# Altium PCB Signal_Generator.PcbDoc
Units mm, origin at the board's own origin, x right, y up, seen from the top; angles counter-clockwise.
Board outline 99.2 x 99.2 mm, 2 copper layers (Top Layer, Bottom Layer), stack 1.671 mm thick; 46 components, 32 nets, 125 pads, 14 vias.
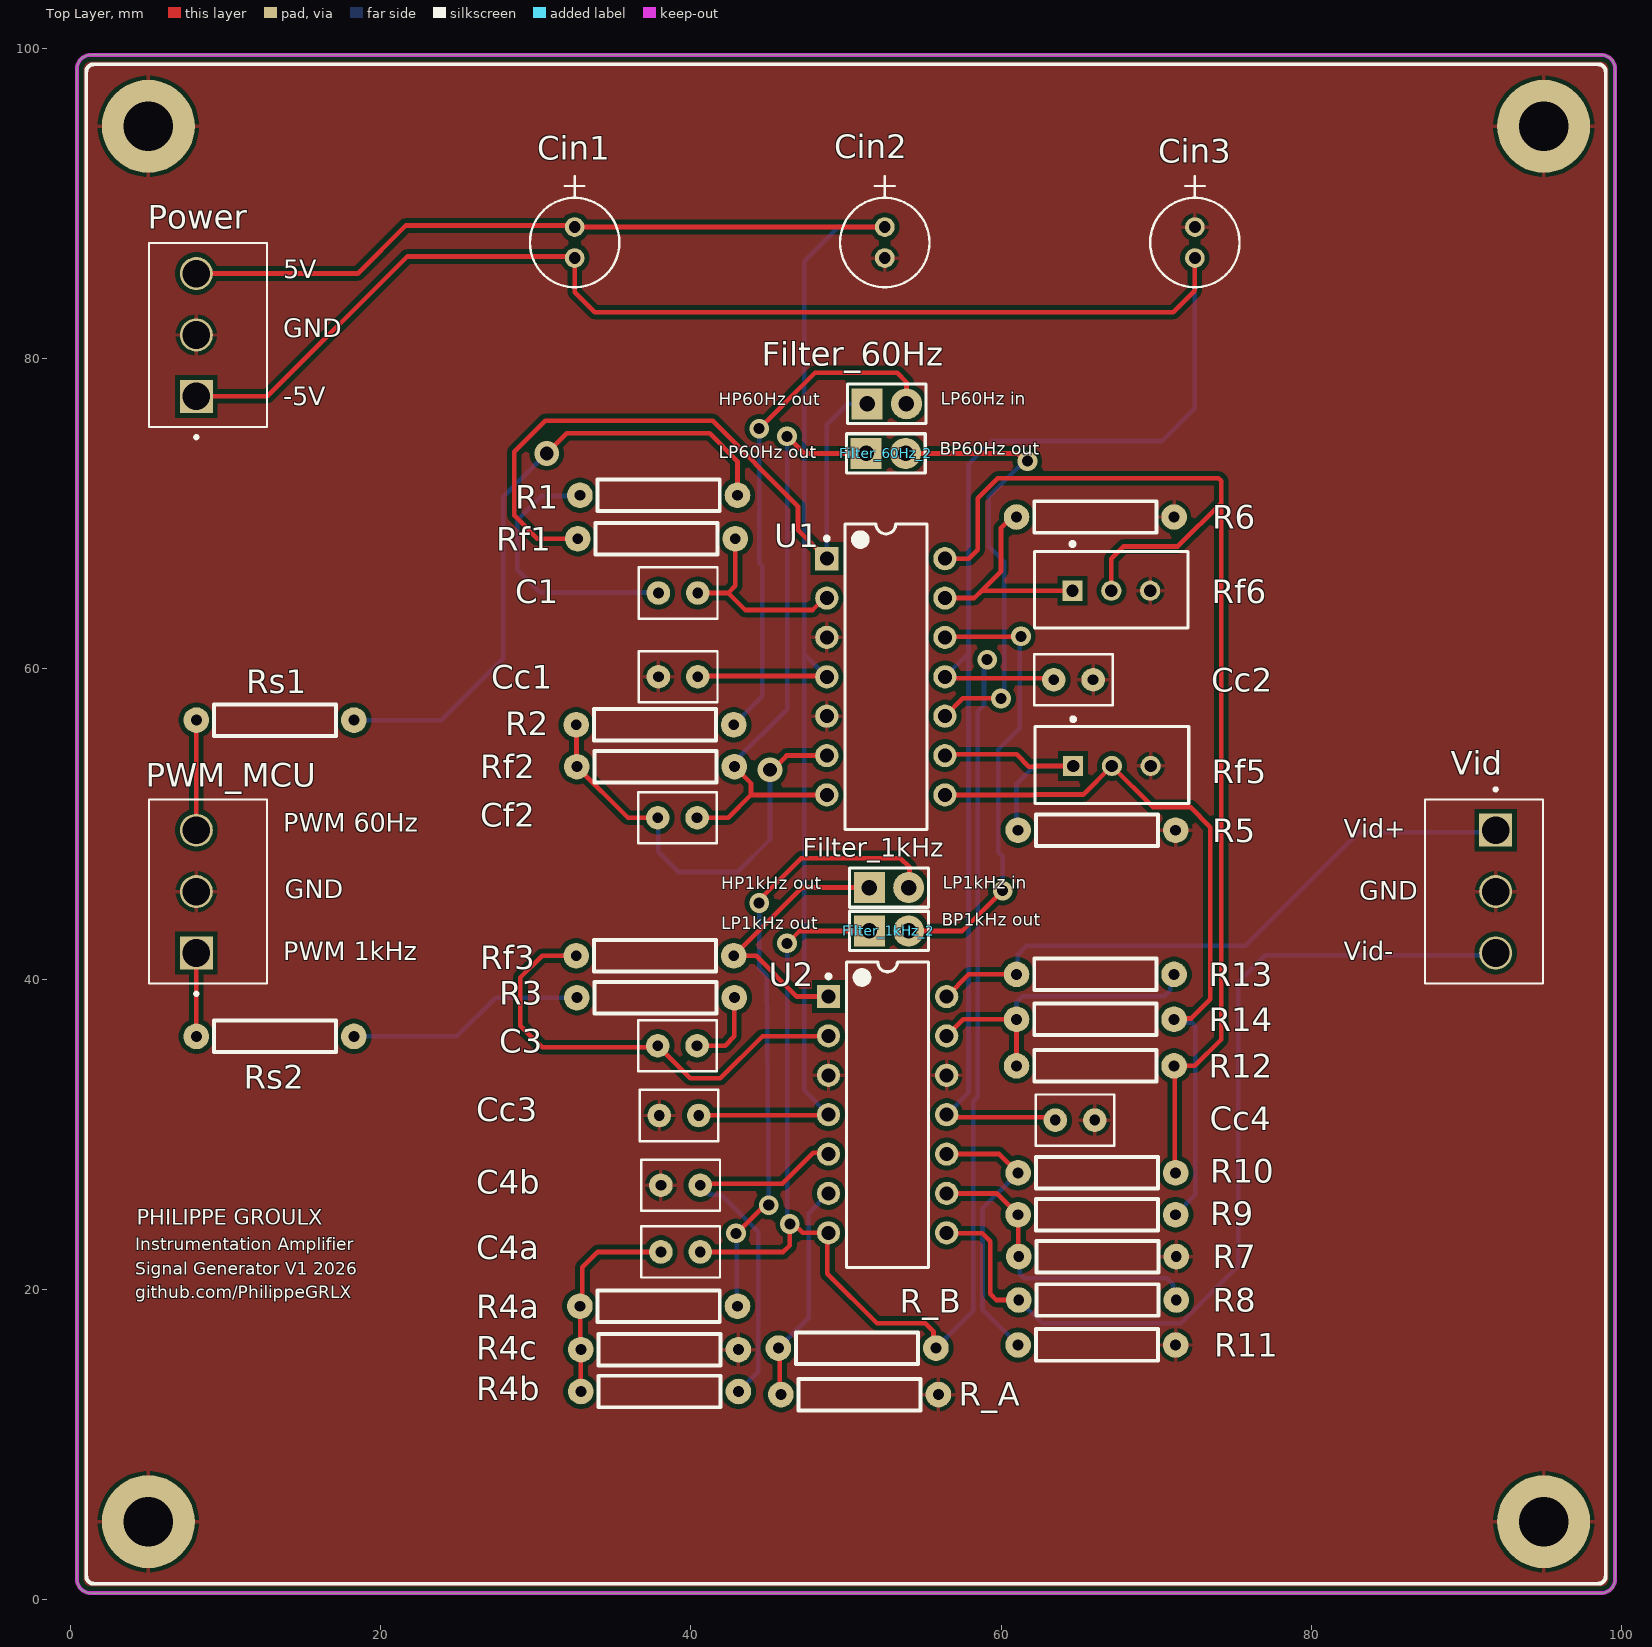
[diagram p0: Top Layer view]
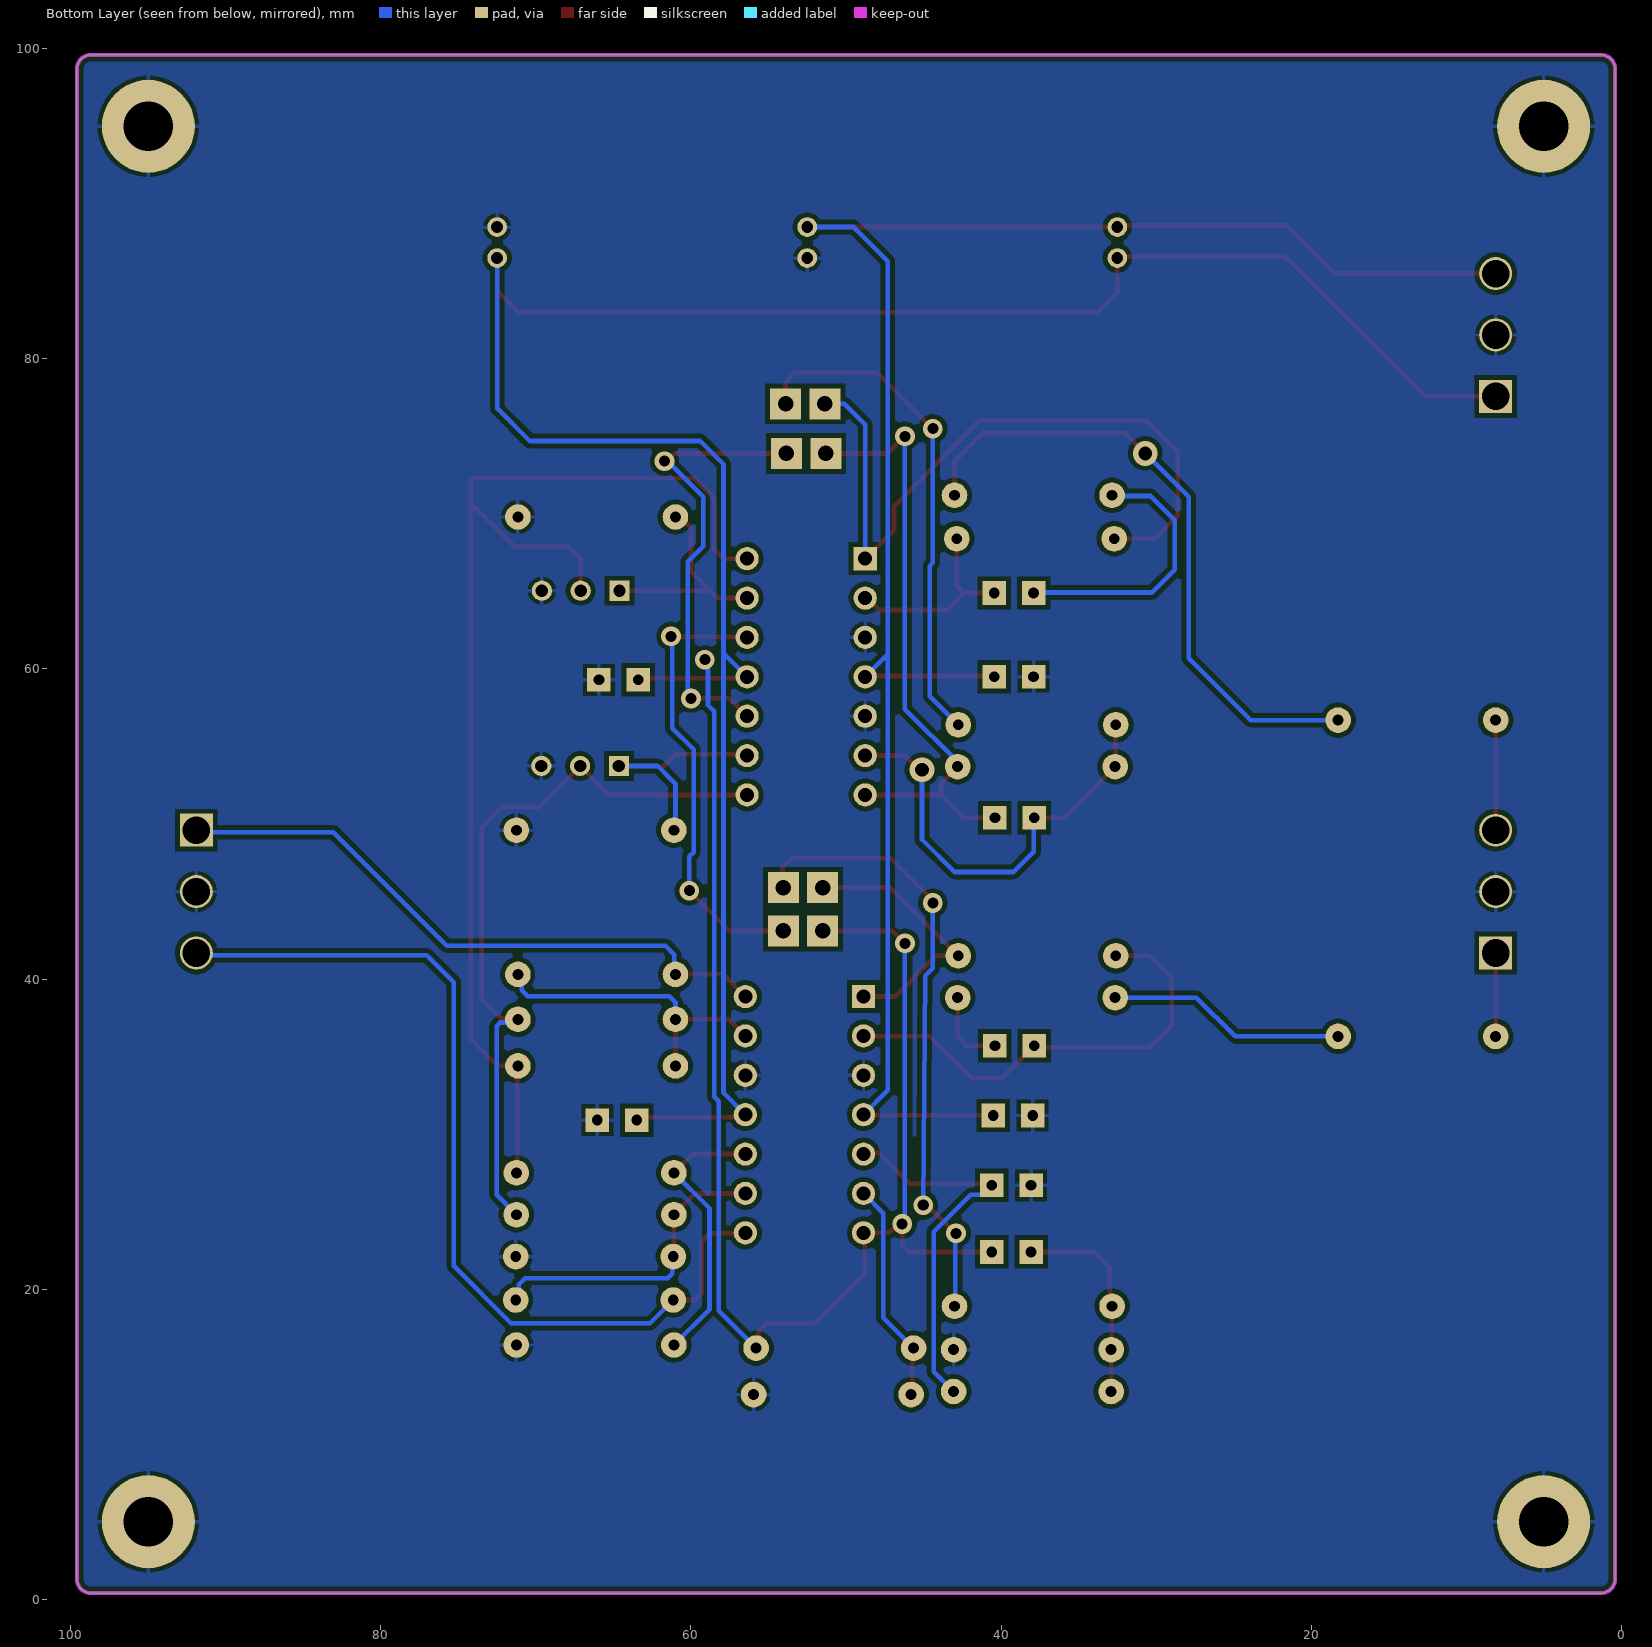
[diagram p1: Bottom Layer view, seen from below]
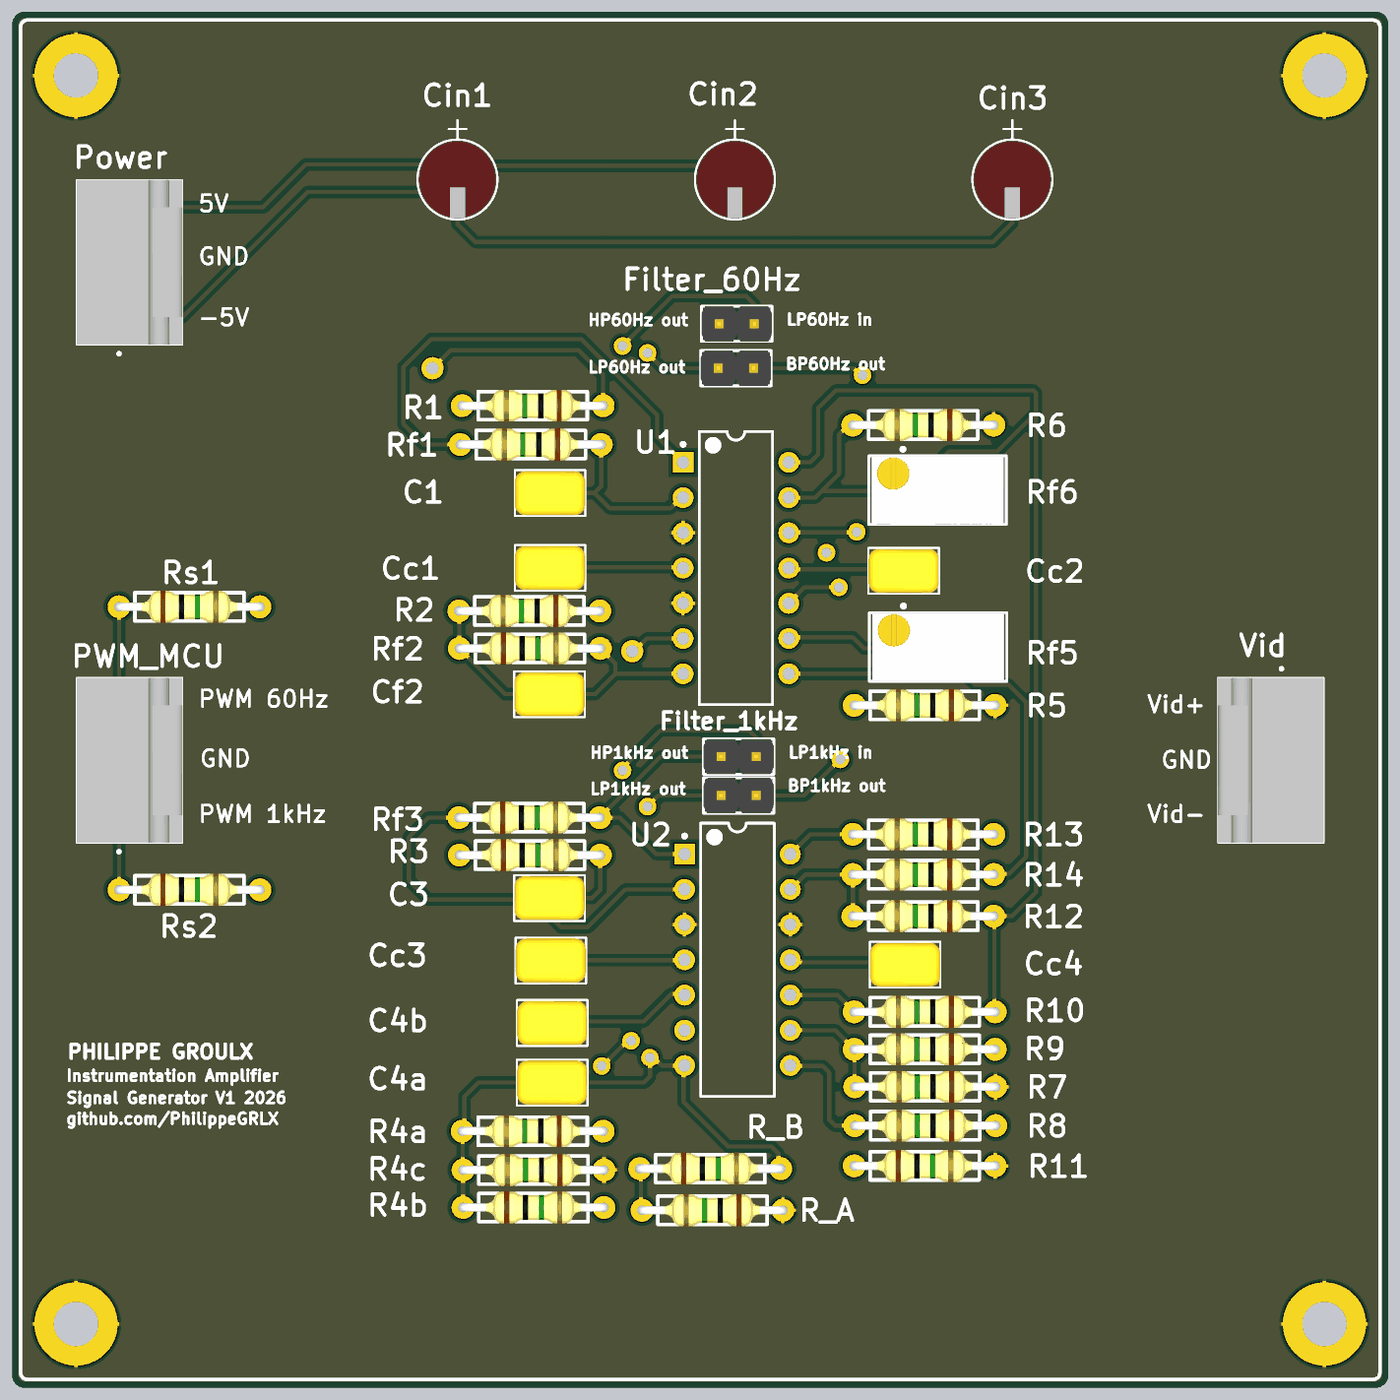
[diagram p2: 3D render of the assembled board from above, using the file's embedded part models]

## Layer stack, top to bottom
Top Solder: solder mask 0.0102, Solder Resist, Dk 3.5
Top Layer: signal copper 0.0356
Dielectric 1: dielectric 1.6, FR-4, Dk 4.8
Bottom Layer: signal copper 0.0356
Bottom Solder: solder mask 0.0102, Solder Resist, Dk 3.5

## Board outline
0.4,98.7 cw(c1.3,98.7) 1.3,99.6 98.7,99.6 cw(c98.7,98.7) 99.6,98.7 99.6,1.3 cw(c98.7,1.3) 98.7,0.4 1.3,0.4 cw(c1.3,1.3) 0.4,1.3

## Design rules (kind name [scope] priority, off if disabled: settings)
Clearance Clearance_2 [InNamedPolygon('GND_L02_P002')] p1: gap=0.3 ignorepadtopadclearanceinfootprint=FALSE
Clearance Clearance_1 [InNamedPolygon('GND_L01_P000')] p2: gap=0.3 ignorepadtopadclearanceinfootprint=FALSE
Clearance [All] p3: gap=0.3 ignorepadtopadclearanceinfootprint=FALSE
HoleSize [All] p1: absolutevalues=TRUE maxlimit=3.2 minlimit=0.025 maxpercent=80.000 minpercent=20.000
PolygonConnect [All] p1: connectstyle=Relief reliefconductorwidth=0.254 reliefentries=4 polygonreliefangle="90 Angle" airgapwidth=0.254
RoutingVias [All] p1: holewidth=0.3 width=0.3 viastyle="Through Hole" minholewidth=0.3 minwidth=0.3 maxholewidth=1 maxwidth=2
SilkToSolderMaskClearance [IsPad] p1: minsilkscreentomaskgap=0.18 clearancetoexposedcopper=TRUE
SolderMaskExpansion [All] p1: expansion=0.102 istentingtop=FALSE
SupplyNets "Schematic Supply Nets_2" [InNet('VDD')] p1: voltage=0.000
SupplyNets "Schematic Supply Nets_1" [InNet('VSS')] p2: voltage=0.000
SupplyNets "Schematic Supply Nets" [InNet('GND')] p3: voltage=0.000
Width [All] p1: maxlimit=0.3 minlimit=0.3 preferedwidth=0.3
28 further rules are at their usual default settings.

## Classes and differential pairs
component class Generator_main: Cin1 Cin2 Cin3 Power PWM_MCU Rs1 Rs2 Vid
component class Filtre_PWM60Hz: C1 Cc1 Cc2 Cf2 Filter_60Hz Filter_60Hz_2 R1 R2 R5 Rf1 Rf2 Rf5 U1
component class Filtre_PWM1kHz: C3 C4a C4b Cc3 Cc4 Filter_1kHz Filter_1kHz_2 R3 R4a R4b R4c R6 R_A R_B Rf3 Rf6 U2
component class Differential_Noise_Generator: R7 R8 R9 R10 R11 R12 R13 R14

## Components (designator, comment, footprint, x,y, rotation, side; value= is the part's Value field where it differs from the comment)
C1 "Cap" "condensateur 0.1uf 100mil" 37.9,64.9 r0 top value=100nF
C3 "Cap" "condensateur 0.1uf 100mil" 40.4,35.7 r180 top value=100nF
C4a "Cap" "condensateur 0.1uf 100mil" 40.6,22.4 r180 top value=100nF
C4b "Cap" "condensateur 0.1uf 100mil" 38.06,26.7 r0 top value=100nF
Cc1 "Cap" "condensateur 0.1uf 100mil" 40.44,59.5 r180 top value=100nF
Cc2 "Cap" "condensateur 0.1uf 100mil" 63.4,59.3 r0 top value=100nF
Cc3 "Cap" "condensateur 0.1uf 100mil" 40.5,31.2 r180 top value=100nF
Cc4 "Cap" "condensateur 0.1uf 100mil" 63.5,30.9 r0 top value=100nF
Cf2 "Cap" "condensateur 0.1uf 100mil" 37.86,50.4 r0 top value=100nF
Cin1 "Cap Pol1" RB7.6-15 32.5,88.5 r270 top value=10uF
Cin2 "Cap Pol1" RB7.6-15 52.5,88.5 r270 top value=10uF
Cin3 "Cap Pol1" RB7.6-15 72.5,88.5 r270 top value=10uF
Filter_1kHz "Jumper" "Header 2P 100mil" 51.5,45.9 r0 top
Filter_1kHz_2 "Jumper" "Header 2P 100mil" 51.5,43.1 r0 top
Filter_60Hz "Jumper" "Header 2P 100mil" 51.36,77.1 r0 top
Filter_60Hz_2 "Jumper" "Header 2P 100mil" 51.3,73.9 r0 top
Power "Header 3" MTA_3M 8.1,77.58 r90 top
PWM_MCU "Header 3" MTA_3M 8.1,41.68 r90 top
R1 "Res1" "Resistor_Axial 0.4" 43,71.2 r180 top value=8.2K
R2 "Res1" "Resistor_Axial 0.4" 42.76,56.4 r180 top value=8.2K
R3 "Res1" "Resistor_Axial 0.4" 32.64,38.8 r0 top value=8.2K
R4a "Res1" "Resistor_Axial 0.4" 43,18.9 r180 top value=8.2K
R4b "Res1" "Resistor_Axial 0.4" 32.9,13.4 r0 top value=8.2K
R4c "Res1" "Resistor_Axial 0.4" 43.06,16.1 r180 top value=8.2K
R5 "Res1" "Resistor_Axial 0.4" 71.26,49.6 r180 top value=8.2K
R6 "Res1" "Resistor_Axial 0.4" 71.16,69.8 r180 top value=8.2K
R7 "Res1" "Resistor_Axial 0.4" 71.3,22.1 r180 top value=8.2K
R8 "Res1" "Resistor_Axial 0.4" 71.3,19.3 r180 top value=8.2K
R9 "Res1" "Resistor_Axial 0.4" 71.26,24.8 r180 top value=8.2K
R10 "Res1" "Resistor_Axial 0.4" 71.26,27.5 r180 top value=8.2K
R11 "Res1" "Resistor_Axial 0.4" 61.1,16.4 r0 top value=8.2K
R12 "Res1" "Resistor_Axial 0.4" 71.16,34.4 r180 top value=8.2K
R13 "Res1" "Resistor_Axial 0.4" 71.16,40.3 r180 top value=8.2K
R14 "Res1" "Resistor_Axial 0.4" 71.16,37.4 r180 top value=8.2K
R_A "Res1" "Resistor_Axial 0.4" 55.96,13.2 r180 top value=8.2K
R_B "Res1" "Resistor_Axial 0.4" 45.64,16.2 r0 top value=8.2K
Rf1 "Res1" "Resistor_Axial 0.4" 42.86,68.4 r180 top value=8.2K
Rf2 "Res1" "Resistor_Axial 0.4" 32.64,53.7 r0 top value=8.2K
Rf3 "Res1" "Resistor_Axial 0.4" 32.6,41.5 r0 top value=8.2K
Rf5 "67WR100KLF" FP-67W-MFG 67.151,53.808 r180 top
Rf6 "67WR100KLF" FP-67W-MFG 67.111,65.109 r180 top
Rs1 "Res1" "Resistor_Axial 0.4" 8.1,56.7 r0 top value=8.2K
Rs2 "Res1" "Resistor_Axial 0.4" 8.1,36.3 r0 top value=8.2K
U1 "TL084ACN" N0014A 52.573,59.494 r0 top
U2 "TL084ACN" N0014A 52.681,31.252 r0 top
Vid "Header 3" MTA_3M 91.9,49.6 r270 top

## Footprints (in the part's own frame and the unit in brackets; to place one, negate y for a bottom-side part, rotate by r counter-clockwise, add the part's x,y. Pads: shape width x height; smd on the part's side, far side on the other; paste and mask are expansions set on the pad)
"condensateur 0.1uf 100mil" [mil] "condensateur 0.1uf 100mil, Thru hole"
  round 60 / inner round 60 / far side rect 60x60 hole 27.56: 1(0,0) 2(100,0)
  silkscreen extent -50,-65 150,65, body extent -50,-63 150,62, height 309
FP-67W-MFG [mm]
  rect 1.3x1.3 hole 0.8 paste-2539.97 mask+0: 1(2.5,0.065)
  round 1.3 hole 0.8 paste-2539.97 mask+0: 2(0,0.065) 3(-2.5,0.065)
  silkscreen extent -4.95,-3.07 4.95,2.47, body extent -5.05,-2.58 5.05,2.58, height 0.25
"Header 2P 100mil" [mm] "Header male"
  rect 2x2 hole 1: 1(0,0)
  round 2 / inner round 2 / far side rect 2x2 hole 1: 2(2.54,0)
  silkscreen extent -1.27,-1.27 3.81,1.27, body extent -1.27,-1.27 3.81,1.27, height 8.59
MTA_3M [mil]
  rect 83.78x83.78 / inner round 83.78 / far side rect 83.78x83.78 hole 70 mask+4.02: 1(0,0)
  round 83.78 hole 70 mask+4.02: 2(155.91,0) 3(311.81,0)
  silkscreen extent -108,-180 390,120, body extent -78,-180 390,120, height 526
N0014A [mm] "DIP, 14-Leads, Body 19.7x6.6mm, Pitch 2.54mm"
  rect 1.5x1.5 hole 0.9: 1(-3.81,7.62)
  round 1.5 hole 0.9: 2(-3.81,5.08) 3(-3.81,2.54) 4(-3.81,0) 5(-3.81,-2.54) 6(-3.81,-5.08) 7(-3.81,-7.62) 8(3.81,-7.62) 9(3.81,-5.08) 10(3.81,-2.54) 11(3.81,0) 12(3.81,2.54) 13(3.81,5.08) 14(3.81,7.62)
  silkscreen extent -3.93,-9.85 2.65,9.85, body extent -3.95,-9.85 3.95,9.85, height 5.08
RB7.6-15 [mil] "Polarized Capacitor (Radial); 2 Leads"
  round 50 hole 30 paste-99999 mask+0: 1(0,0) 2(78.74,0)
  silkscreen extent -129,-113 153,114, body extent -69,-108 149,108, height 493
"Resistor_Axial 0.4" [mil] "Résistance 1/4 watt 0.4p"
  round 65 hole 27.56: 1(0,0) 2(400,0)
  silkscreen extent 45,-40 355,40, body extent -12,-45 412,46, height 116

## Part data
C1 C3 C4a C4b Cc1 Cc2 Cc3 Cc4 Cf2: "Capacitor", LatestRevisionDate=17-Jul-2002, LatestRevisionNote="Re-released for DXP Platform.", PackageDescription="Radial Cap, Thru-Hole; 2 Leads; 0.3 in Pin Spacing", PackageReference=RAD-0.3, Published=8-Jun-2000, Publisher="Altium Limited"
Cin1 Cin2 Cin3: "Polarized Capacitor (Radial)", LatestRevisionDate=17-Jul-2002, LatestRevisionNote="Re-released for DXP Platform.", PackageDescription="Polarized Capacitor (Radial); 2 Leads", PackageReference=RB7.6-15, Published=8-Jun-2000, Publisher="Altium Limited"
Filter_1kHz Filter_1kHz_2 Filter_60Hz Filter_60Hz_2: library part "header 2 pin_UL", "CONN HEADER VERT 3POS 2.54MM", Digikey=732-5315-ND, LatestRevisionDate=17-Jul-2002, LatestRevisionNote="Re-released for DXP Platform.", Publisher="Altium Limited"
Power PWM_MCU Vid: "Header, 3-Pin", LatestRevisionDate=17-Jul-2002, LatestRevisionNote="Re-released for DXP Platform.", Publisher="Altium Limited"
R1 R2 R3 R4a R4b R4c R5 R6 R7 R8 R9 R10 R11 R12 R13 R14 R_A R_B Rf1 Rf2 Rf3 Rs1 Rs2: "Resistor", LatestRevisionDate=17-Jul-2002, LatestRevisionNote="Re-released for DXP Platform.", PackageDescription="Axial Device, Thru-Hole; 2 Leads; 0.3 in Pin Spacing", PackageReference=AXIAL-0.3, Published=8-Jun-2000, Publisher="Altium Limited"
Rf5 Rf6: library part CMP-50449-000002-1, "TRIMMER 100K OHM 0.5W PC PIN TOP", Max Operating Temperature=125°C, Max Power Dissipation=500mW, Min Operating Temperature=-55°C, Package Quantity=100, Resistance=100kR, Resistance Tolerance=10%, Resistor Type=Cermet, Temperature Coefficient=100ppm/°C, Voltage Rating=200V, Depth=4.95mm, Height=0.409inch, Lead Free="Lead Free", Length=9.53mm, Military Standard=Not, Mount="Through Hole", Number of Turns=20, Packaging=Bulk, Power Rating=500mW, Radiation Hardening=No, REACH SVHC="No SVHC", RoHS Compliant=Yes, Series=67, Technology=CERMET, Termination=Pin, Tolerance=10%, Type=Potentiometer, Voltage Rating (DC)=200V, Weight=1.1g
U1 U2: library part CMP-0017-00814-2, "JFET-Input Operational Amplifier, 7 to 36 V, 0 to 70 degC, 14-pin DIP (N14), Pb-Free (RoHS)", Manufacturer="Texas Instruments", Rating=Catalog, Total Supply Voltage(Max)(+5V is 5, +/-5V is 10)=36, Total Supply Voltage(Min)(+5V is 5, +/-5V is 10)=7, CMRR(Min)(dB)=75, Code_JEDEC=MS-001, ComponentLink1Description="Manufacturer URL", ComponentLink1URL=http://www.ti.com/, ComponentLink2Description=Datasheet, ComponentLink2URL=http://www.ti.com/lit/ds/symlink/tl084a.pdf, ComponentLink3Description="Package Specification", ComponentLink3URL=http://www.ti.com/lit/ml/mpdi002c/mpdi002c.pdf, DatasheetVersion=SLOS081G, Eco-Plan="Pb-Free (RoHS)", GBW(Typ)(MHz)=3, IIB(Max)(pA)=200, Iq per channel(Max)(mA)=2.8, Mounting Technology="Through Hole", Number of Channels=4, Offset Drift(Typ)(uV/C)=18, PackageDescription="14-Pin Plastic In-Line, Body 19.305 x 6.35 mm, Pitch 2.54 mm", PackageReference=N0014A, PackageVersion="4040049/E, 12/2002", PartNumber=TL084ACN, Slew Rate(Typ)(V/us)=13, Sub Family="General Purpose Amplifier, High Supply Voltage Amplifier (>=30V)", Vio (25C)(Max)(mV)=6, Vn at 1kHz(Typ)(nV/rtHz)=18

## Free pads (board coordinates)
  round 6 hole 3.2: 1(5,5) 1(5,95) 1(95,5) 1(95,95)

## Via types
v1: diameter 1.27, hole 0.711, Top Layer to Bottom Layer, 12 vias
v2: diameter 1.6, hole 0.9, Top Layer to Bottom Layer, 2 vias

## Nets (pads, with @x,y where several pads share a name; then routed paths per layer and width w, separated by ;. In a path a pad name is that pad's centre, name@x,y a point inside that pad or via, vN(x,y) a via of type N, cw(c..) or ccw(c..) an arc to the next point about the centre after c; other vN are vias at no path point)
GND: C4b.1 Cc1.2 Cc2.2 Cc3.2 Cc4.2 Cin2.2 Cin3.1 pad.1 Power.2 PWM_MCU.2 R4c.1 R5.1 R6.1 R7.1 R11.2 R_A.1 Rf5.3 Rf6.3 U1.3 U1.5 U2.3 U2.12 Vid.2
NetC1_1: C1.1 R1.2 | length 17.5
  Bottom Layer w0.3: R1.2@32.731,71.151 30.351,71.151 28.8,69.6 28.8,66.4 30.272,64.928 37.872,64.928 C1.1
NetC1_2: C1.2 Rf1.1 U1.2 | length 12.8
  Top Layer w0.3: C1.2 42.4,64.9 ; Rf1.1 42.86,65.36 42.4,64.9 ; U1.2 48.614,64.574 47.84,63.8 43.5,63.8 42.4,64.9
NetC3_1: C3.1 R3.2 | length 5.1
  Top Layer w0.3: C3.1 42.2,35.7 42.8,36.3 R3.2
NetC3_2: C3.2 Rf3.1 U2.2 | length 29.8
  Top Layer w0.3: Rf3.1 30.4,41.5 29,40.1 29,37 30.403,35.597 37.757,35.597 C3.2 39.96,33.6 41.9,33.6 44.616,36.316 48.855,36.316 U2.2
NetC4a_2: C4a.2 R4a.2 R4b.1 R4c.2 | length 13.6
  Top Layer w0.3: R4b.1 R4c.2 32.87,16.13 32.87,18.87 R4a.2 33,19.06 33,21.4 34,22.4 C4a.2
NetC4b_2: C4b.2 R4b.2 U2.5 | length 25.3
  Top Layer w0.3: C4b.2 40.7,26.8 45.9,26.8 47.9,28.8 48.783,28.8 U2.5
  Bottom Layer w0.3: C4b.2 41.212,26.088 41.946,26.088 44.335,23.699 44.335,14.676 R4b.2 ; U2.5@48.546,28.712 U2.5
NetCf2_1: Cf2.1 R2.2 Rf2.1 U1.6 | length 28.7
  Top Layer w0.3: R2.2 32.62,56.38 32.62,53.72 Rf2.1 35.94,50.4 Cf2.1 ; v2(45.1,53.5) 45.252,53.5 46.166,54.414 U1.6
  Bottom Layer w0.3: Cf2.1 37.9,50.36 37.9,48.2 39.2,46.9 43,46.9 45.1,49 v2(45.1,53.5)
NetPWM_MCU_1: PWM_MCU.1 Rs2.1 | length 5.4
  Top Layer w0.3: Rs2.1 PWM_MCU.1
NetPWM_MCU_3: PWM_MCU.3 Rs1.1 | length 7.1
  Top Layer w0.3: PWM_MCU.3 Rs1.1
NetR1_1: R1.1 Rs1.2 | length 41.5
  Top Layer w0.3: v2(30.7,73.9) 32,75.2 41.2,75.2 43,73.4 R1.1@43,71.178
  Bottom Layer w0.3: Rs1.2 23.9,56.7 27.9,60.7 27.9,71.1 v2(30.7,73.9)
NetR3_1: R3.1 Rs2.2 | length 15.4
  Bottom Layer w0.3: Rs2.2 24.9,36.3 27.4,38.8 R3.1
NetR5_2: R5.2 Rf5.1 U1.9 | length 15.8
  Top Layer w0.3: U1.9 56.469,54.5 61,54.5 61.8,53.7 62.1,53.7 62.143,53.743 Rf5.1
  Bottom Layer w0.3: R5.2 61,49.7 61,52.6 62.143,53.743 Rf5.1
NetR6_2: R6.2 Rf6.1 U1.13 | length 14.3
  Top Layer w0.3: U1.13 58.274,64.574 58.744,65.044 ; R6.2 60.7,69.8 60,69.1 60,66.3 58.744,65.044 ; Rf6.1 58.744,65.044
NetR7_2: R7.2 R8.1 R9.2 U2.9 | length 20.3
  Top Layer w0.3: U2.9 59.728,26.172 R9.2 61.12,24.78 61.12,22.12 R7.2
  Bottom Layer w0.3: R7.2 61.2,22.04 61.2,21 61.5,20.7 70.7,20.7 71.098,20.302 71.098,19.502 R8.1
NetR8_2: R8.2 U2.8 Vid.3 | length 60.5
  Top Layer w0.3: U2.8 56.523,23.6 58.8,23.6 59.3,23.1 59.3,19.7 59.7,19.3 R8.2
  Bottom Layer w0.3: R8.2 62.64,17.8 71.604,17.8 75.3,21.496 75.3,39.8 77.04,41.54 91.64,41.54 Vid.3@91.9,41.28
NetR9_1: R9.1 R14.1 Rf5.2 U1.8 | length 47.8
  Top Layer w0.3: U1.8 62.174,51.874 62.2,51.9 65.308,51.9 Rf5.2 69.794,51.1 72.2,51.1 73.5,49.8 73.5,38.7 72.26,37.46 71.22,37.46 R14.1
  Bottom Layer w0.3: R14.1 71.36,37.2 72.3,37.2 72.535,36.965 72.535,26.076 R9.1
NetR10_1: R10.1 R12.1 Rf6.2 U1.14 | length 79.3
  Top Layer w0.3: U1.14 57.914,67.114 58.5,67.7 58.5,71 59.8,72.3 74.024,72.3 74.2,72.124 74.2,70.7 ; Rf6.2 67.111,67.111 67.9,67.9 71.4,67.9 74.2,70.7 ; R10.1 71.21,27.55 71.21,34.35 R12.1 72.5,34.4 74.2,36.1 74.2,70.7
NetR10_2: R10.2 R11.1 U2.10 | length 18.1
  Top Layer w0.3: U2.10 59.888,28.712 R10.2
  Bottom Layer w0.3: R11.1 58.8,18.7 58.8,25.2 R10.2
NetR12_2: R12.2 R13.1 R14.2 U2.13 | length 20.4
  Top Layer w0.3: U2.13 57.559,37.4 R14.2 R12.2
  Bottom Layer w0.3: R14.2 61,38.5 61.4,38.9 70.524,38.9 70.908,39.284 70.908,40.048 R13.1
NetR13_2: R13.2 U2.14 Vid.1 | length 40.6
  Top Layer w0.3: U2.14 57.919,40.3 R13.2
  Bottom Layer w0.3: R13.2 61.075,40.375 61.075,41.575 61.64,42.14 75.74,42.14 83.06,49.46 91.64,49.46 Vid.1@91.9,49.2
NetR_A_2: R_A.2 R_B.1 U2.6 | length 14.4
  Top Layer w0.3: R_B.1 45.72,16.12 45.72,13.28 R_A.2
  Bottom Layer w0.3: R_B.1 47.6,18.16 47.6,24.901 U2.6
VDD: Cc1.1 Cc3.1 Cin1.1 Cin2.1 Power.3 U1.4 U2.4 | length 126.4
  Top Layer w0.3: Power.3 18.5,85.5 21.6,88.6 32.4,88.6 Cin1.1 Cin2.1 ; Cc1.1 40.487,59.547 48.71,59.547 U1.4 ; Cc3.1 40.526,31.226 48.845,31.226 U2.4
  Bottom Layer w0.3: U1.4 47.3,60.957 ; U2.4 47.3,32.823 47.3,60.957 ; Cin2.1 49.5,88.5 47.3,86.3 47.3,60.957
Vin_LP1kHz: Filter_1kHz.2 R4a.1 | length 39.9
  Top Layer w0.3: v1(42.9,23.6) 42.95,23.6 44.767,25.417 v1(45.017,25.417) ; v1(44.4,44.9) 44.4,45.1 47.1,47.8 53.5,47.8 54.1,47.2 54.1,45.96 Filter_1kHz.2
  Bottom Layer w0.3: v1(42.9,23.6) 42.95,23.55 42.95,18.95 R4a.1 ; v1(44.4,44.9) 44.4,40.709 44.9,40.209 v1(45.017,25.417)
Vin_LP60Hz: Filter_60Hz.2 R2.1 | length 32.6
  Top Layer w0.3: v1(44.4,75.5) 48,79.1 53.3,79.1 53.9,78.5 Filter_60Hz.2
  Bottom Layer w0.3: R2.1 44.6,58.24 44.6,66.639 44.4,66.839 v1(44.4,75.5)
Vout_BP1kHz: Filter_1kHz_2.2 U1.12 | length 29.2
  Top Layer w0.3: Filter_1kHz_2.2 57.5,43.1 v1(60.1,45.7) ; U1.12 56.416,62.067 61.252,62.067 v1(61.285,62.1)
  Bottom Layer w0.3: v1(60.1,45.7) 60.1,47.908 59.825,48.183 59.825,54.804 61.2,56.179 61.2,62.015 v1(61.285,62.1)
Vout_BP60Hz: Filter_60Hz_2.2 U1.10 | length 29.1
  Top Layer w0.3: Filter_60Hz_2.2 61.039,73.9 61.539,73.4 v1(61.7,73.4) ; U1.10 57.529,58.1 v1(60,58.1)
  Bottom Layer w0.3: v1(60,58.1) 60.186,58.286 60.186,58.746 60.2,58.761 60.2,66.9 59.2,67.9 59.2,71.1 61.5,73.4 v1(61.7,73.4)
Vout_HP1kHz: Filter_1kHz.1 Rf3.2 U2.1 | length 17.8
  Top Layer w0.3: U2.1 46.828,38.872 44.2,41.5 Rf3.2 47.16,45.9 Filter_1kHz.1
Vout_HP60Hz: Filter_60Hz.1 Rf1.2 U1.1 | length 46.2
  Top Layer w0.3: Rf1.2 30.1,68.4 28.6,69.9 28.6,74 30.6,76 41.4,76 46.9,70.5 46.9,68.977 U1.1
  Bottom Layer w0.3: U1.1 48.763,75.763 50.1,77.1 Filter_60Hz.1
Vout_LP1kHz: C4a.1 Filter_1kHz_2.1 R_B.2 U2.7 | length 91.8
  Top Layer w0.3: C4a.1 45.962,22.4 46.376,22.814 v1(46.376,24.2) 46.638,24.2 47.206,23.632 U2.7 48.8,23.561 48.8,21 52,17.8 55.1,17.8 55.648,17.252 55.648,16.352 R_B.2 ; v1(46.2,42.3) 47,43.1 Filter_1kHz_2.1
  Bottom Layer w0.3: v1(46.2,42.3) 46.2,24.376 v1(46.376,24.2) ; R_B.2 58.2,18.6 58.2,32.112 58.5,32.412 58.5,57.268 58.9,57.668 58.9,59.939 58.914,59.954 58.914,60.414 v1(59.1,60.6)
Vout_LP60Hz: Cf2.2 Filter_60Hz_2.1 Rf2.2 U1.7 | length 39.5
  Top Layer w0.3: Cf2.2 42.4,50.4 43.874,51.874 ; Rf2.2 43.874,52.626 43.874,51.874 ; v1(46.2,75) 47.3,73.9 Filter_60Hz_2.1 ; U1.7 43.874,51.874
  Bottom Layer w0.3: Rf2.2 42.8,54.004 46.2,57.404 v1(46.2,75)
VSS: Cc2.1 Cc4.1 Cin1.2 Cin3.2 Power.1 U1.11 U2.11 | length 158.3
  Top Layer w0.3: Power.1 12.68,77.58 21.7,86.6 32.4,86.6 Cin1.2 32.5,84.3 33.8,83 71.1,83 72.5,84.4 Cin3.2 ; U1.11 56.48,59.397 63.303,59.397 Cc2.1 ; U2.11 56.667,31.076 63.324,31.076 Cc4.1
  Bottom Layer w0.3: U1.11 57.9,61.011 ; U2.11 57.9,32.661 57.9,61.011 ; Cin3.2 72.5,76.8 70.4,74.7 59.4,74.7 57.9,73.2 57.9,61.011

## Polygon pours and split planes (outlines as drawn)
GND on Top Layer "GND_L01_P001" (solid, pour order 1): 0.4,99.6 99.6,99.6 99.6,0.4 0.4,0.4
GND on Bottom Layer "GND_L02_P000" (solid, pour order 0): 0.4,99.6 99.6,99.6 99.6,0.4 0.4,0.4

## Keep-outs
Keep-Out Layer:
  lines w0.254: 0.4,98.2 0.4,98.7 ; 0.4,98.7 cw(c1.3,98.7) 1.3,99.6 98.7,99.6 cw(c98.7,98.7) 99.6,98.7 99.6,1.3 cw(c98.7,1.3) 98.7,0.4 95.5,0.4 1.3,0.4 cw(c1.3,1.3) 0.4,1.3 0.4,77.5 0.4,98.7

## Silkscreen, mask and mechanical layers (free items; w line width, h text height)
Top Overlay:
  lines w0.254: 4.5,1 98.5,1 ccw(c98.5,1.5) 99,1.5 99,98.5 ccw(c98.5,98.5) 98.5,99 1.5,99 ccw(c1.5,98.5) 1,98.5 1,1.5 ccw(c1.5,1.5) 1.5,1 7.7,1
  text "5V" at 13.7,85.2 h1.2
  text "GND" at 13.7,81.4 h1.2
  text "LP60Hz in" at 56.11,77.03 h0.8
  text "-5V" at 13.7,77 h1.2
  text "HP60Hz out" at 41.8,77 h0.8
  text "BP60Hz out" at 56.05,73.83 h0.8
  text "LP60Hz out" at 41.8,73.6 h0.8
  text "PWM 60Hz" at 13.7,49.5 h1.2
  text "Vid+" at 82.1,49.1 h1.2
  text "LP1kHz in" at 56.25,45.83 h0.8
  text "HP1kHz out" at 41.94,45.8 h0.8
  text "GND" at 13.8,45.2 h1.2
  text "GND" at 83.1,45.1 h1.2
  text "BP1kHz out" at 56.19,43.43 h0.8
  text "LP1kHz out" at 41.94,43.2 h0.8
  text "PWM 1kHz" at 13.7,41.2 h1.2
  text "Vid-" at 82.1,41.2 h1.2
  text "PHILIPPE GROULX" at 4.254,24.154 h1
  text "Instrumentation Amplifier" at 4.154,22.521 h0.8
  text "Signal Generator V1 2026" at 4.154,20.921 h0.8
  text "github.com/PhilippeGRLX" at 4.154,19.421 h0.8